# EAGLE board paddlepanelize (EAGLE 7.6.0)
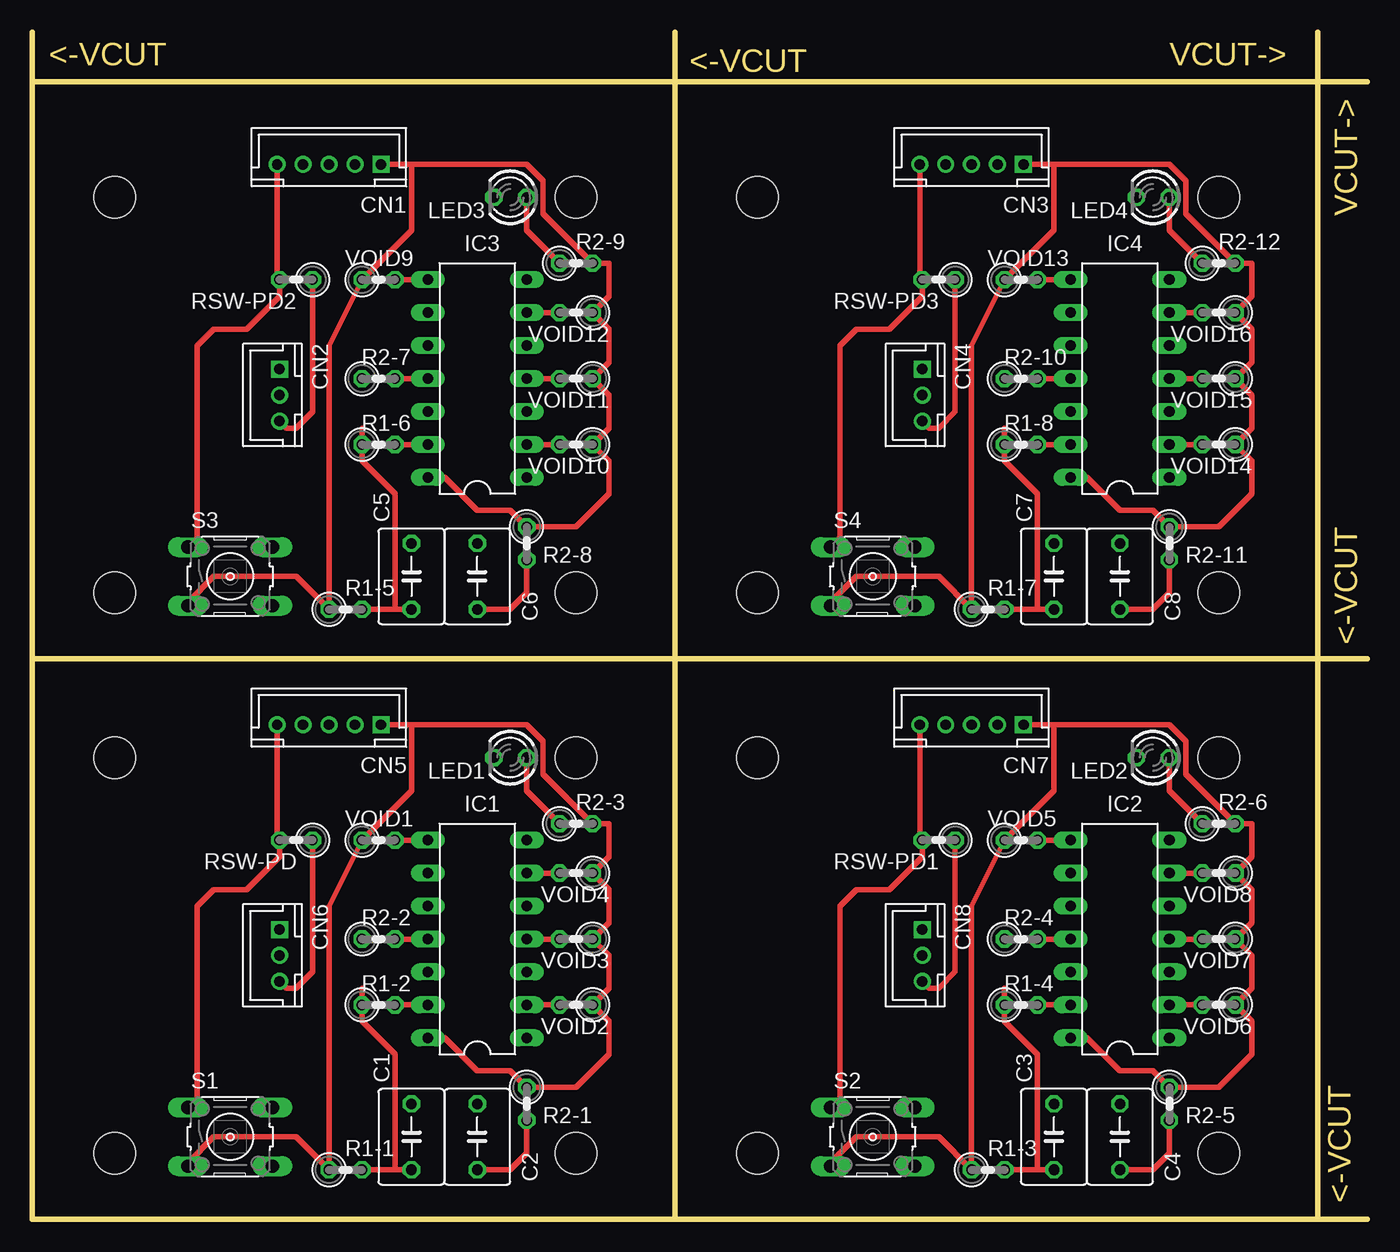
[diagram p0: board, top side]
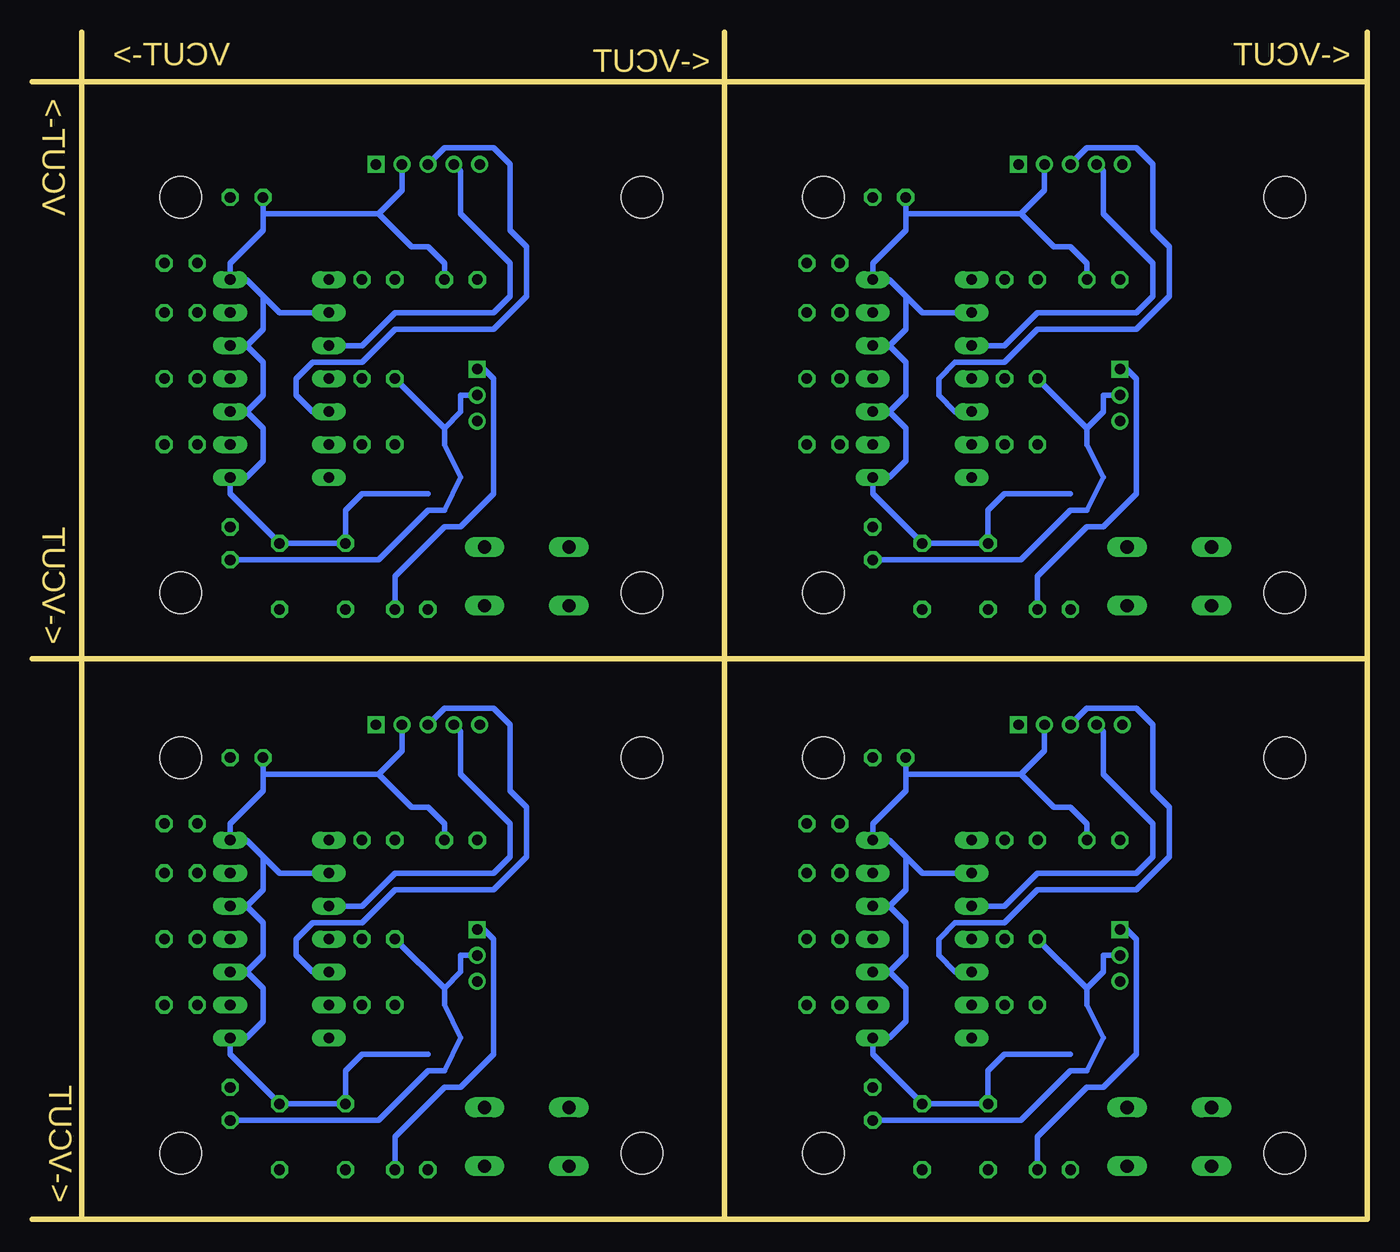
[diagram p1: board, bottom side, seen from below]

Size 102.87 x 91.44 mm. Coordinates in mm from the lower left corner, seen from the top.
Outline: 49.2,87.62 0,87.62
Outline: 49.53,0 49.53,43.17
Outline: 49.53,43.17 49.53,91.44
Outline: 0,43.17 0,40.64 0,0 49.53,0
Outline: 0,43.17 0,43.18
Outline: 0,43.18 0,87.63
Outline: 0,87.63 0,91.44
Outline: 0,87.63 102.87,87.63
Outline: 99.06,91.44 99.06,0
Outline: 0,43.18 102.87,43.18
Outline: 49.53,0 99.06,0
Outline: 99.06,0 102.87,0
Outline: 0,86.35 0,43.17
Outline: 49.53,86.35 49.53,43.17
Outline: 49.53,43.17 49.53,40.64
Outline: 49.2,43.17 0,43.17
Outline: 98.73,43.17 49.53,43.17
Copper layers (1*16): Top 0.035mm / dielectric 1.5mm / Bottom 0.035mm
Design rules "SeeedStudio_2layer_DRU_no_angle_20140221": minimum track width 6mil, minimum drill 12mil, track to track 6mil, track to pad 6mil, pad to pad 6mil, via to via 6mil, smd to smd 0mil, copper to edge 10mil, drill to drill 10mil, minimum pad ring 10mil, minimum via ring 6mil, stop-mask expansion 2mil, vias tented up to drill 100mil, thermal gap 10mil
Holes 3.2 mm at 6.35,78.74 41.91,78.74 6.35,48.26 41.91,48.26 55.88,78.74 91.44,78.74 55.88,48.26 91.44,48.26 6.35,35.56 41.91,35.56 6.35,5.08 41.91,5.08 55.88,35.56 91.44,35.56 55.88,5.08 91.44,5.08

## Footprints (pad centres in the part's own frame; a part is rotated, then mirrored left to right if it is on the bottom)
C050-050X075 = drill 0.813 octagon: 1 -2.54,0; 2 2.54,0
B5B-PH-K-S = drill 0.8 square: 1 -4,0 | drill 0.8: 2 -2,0; 3 0,0; 4 2,0; 5 4,0
B3B-PH-K-S = drill 0.8 square: 1 -2,0 | drill 0.8: 2 0,0; 3 2,0
DIL14 = drill 0.813 long: 1 -7.62,-3.81; 2 -5.08,-3.81; 3 -2.54,-3.81; 4 0,-3.81; 5 2.54,-3.81; 6 5.08,-3.81; 7 7.62,-3.81; 8 7.62,3.81; 9 5.08,3.81; 10 2.54,3.81; 11 0,3.81; 12 -2.54,3.81; 13 -5.08,3.81; 14 -7.62,3.81
LED3MM = drill 0.813 octagon: A -1.27,0; K 1.27,0
0207/2V = drill 0.813 octagon: 1 -1.27,0; 2 1.27,0
B3F-10XX = drill 1.016 long: 1 -3.251,2.261; 2 3.251,2.261; 3 -3.251,-2.261; 4 3.251,-2.261

## Placement (x,y rotation side)
C1  0.1uF  [C050-050X075]  29.21,6.35 90 top
C2  0.1uF  [C050-050X075]  34.29,6.35 90 top
C3  0.1uF  [C050-050X075]  78.74,6.35 90 top
C4  0.1uF  [C050-050X075]  83.82,6.35 90 top
C5  0.1uF  [C050-050X075]  29.21,49.53 90 top
C6  0.1uF  [C050-050X075]  34.29,49.53 90 top
C7  0.1uF  [C050-050X075]  78.74,49.53 90 top
C8  0.1uF  [C050-050X075]  83.82,49.53 90 top
CN1  OutSginal  [B5B-PH-K-S]  22.86,81.28 180 top
CN2  Rotary  [B3B-PH-K-S]  19.05,63.5 270 top
CN3  OutSginal  [B5B-PH-K-S]  72.39,81.28 180 top
CN4  Rotary  [B3B-PH-K-S]  68.58,63.5 270 top
CN5  OutSginal  [B5B-PH-K-S]  22.86,38.1 180 top
CN6  Rotary  [B3B-PH-K-S]  19.05,20.32 270 top
CN7  OutSginal  [B5B-PH-K-S]  72.39,38.1 180 top
CN8  Rotary  [B3B-PH-K-S]  68.58,20.32 270 top
IC1  74LS14N  [DIL14]  34.29,21.59 90 top
IC2  74LS14N  [DIL14]  83.82,21.59 90 top
IC3  74LS14N  [DIL14]  34.29,64.77 90 top
IC4  74LS14N  [DIL14]  83.82,64.77 90 top
LED1  [LED3MM]  36.83,35.56 180 top
LED2  [LED3MM]  86.36,35.56 180 top
LED3  [LED3MM]  36.83,78.74 180 top
LED4  [LED3MM]  86.36,78.74 180 top
R1-1  10K  [0207/2V]  24.13,3.81 0 top
R1-2  100  [0207/2V]  26.67,16.51 0 top
R1-3  10K  [0207/2V]  73.66,3.81 0 top
R1-4  100  [0207/2V]  76.2,16.51 0 top
R1-5  10K  [0207/2V]  24.13,46.99 0 top
R1-6  100  [0207/2V]  26.67,59.69 0 top
R1-7  10K  [0207/2V]  73.66,46.99 0 top
R1-8  100  [0207/2V]  76.2,59.69 0 top
R2-1  10K  [0207/2V]  38.1,8.89 270 top
R2-2  100  [0207/2V]  26.67,21.59 0 top
R2-3  480  [0207/2V]  41.91,30.48 0 top
R2-4  100  [0207/2V]  76.2,21.59 0 top
R2-5  10K  [0207/2V]  87.63,8.89 270 top
R2-6  480  [0207/2V]  91.44,30.48 0 top
R2-7  100  [0207/2V]  26.67,64.77 0 top
R2-8  10K  [0207/2V]  38.1,52.07 270 top
R2-9  480  [0207/2V]  41.91,73.66 0 top
R2-10  100  [0207/2V]  76.2,64.77 0 top
R2-11  10K  [0207/2V]  87.63,52.07 270 top
R2-12  480  [0207/2V]  91.44,73.66 0 top
RSW-PD  10K  [0207/2V]  20.32,29.21 180 top
RSW-PD1  10K  [0207/2V]  69.85,29.21 180 top
RSW-PD2  10K  [0207/2V]  20.32,72.39 180 top
RSW-PD3  10K  [0207/2V]  69.85,72.39 180 top
S1  1  [B3F-10XX]  15.24,6.35 0 top
S2  1  [B3F-10XX]  64.77,6.35 0 top
S3  1  [B3F-10XX]  15.24,49.53 0 top
S4  1  [B3F-10XX]  64.77,49.53 0 top
VOID1  10K  [0207/2V]  26.67,29.21 0 top
VOID2  10K  [0207/2V]  41.91,16.51 180 top
VOID3  10K  [0207/2V]  41.91,21.59 180 top
VOID4  10K  [0207/2V]  41.91,26.67 180 top
VOID5  10K  [0207/2V]  76.2,29.21 0 top
VOID6  10K  [0207/2V]  91.44,16.51 180 top
VOID7  10K  [0207/2V]  91.44,21.59 180 top
VOID8  10K  [0207/2V]  91.44,26.67 180 top
VOID9  10K  [0207/2V]  26.67,72.39 0 top
VOID10  10K  [0207/2V]  41.91,59.69 180 top
VOID11  10K  [0207/2V]  41.91,64.77 180 top
VOID12  10K  [0207/2V]  41.91,69.85 180 top
VOID13  10K  [0207/2V]  76.2,72.39 0 top
VOID14  10K  [0207/2V]  91.44,59.69 180 top
VOID15  10K  [0207/2V]  91.44,64.77 180 top
VOID16  10K  [0207/2V]  91.44,69.85 180 top

## Library data of the parts
C1-C8 R1-1-R1-8 R2-1-R2-12 RSW-PD RSW-PD1-RSW-PD3 VOID1-VOID16 = resistor
CN1-CN8 = jst-ph
IC1-IC4 = 74xx-us
LED1-LED4 = led
S1-S4 = switch-omron; MPN: B3F-1000; OC_FARNELL: 176432; OC_NEWARK: 36M3542

## Nets
GND: C1.2 C2.2 CN5.2 CN6.3 IC1.1 IC1.3 IC1.5 IC1.7 IC1.9 LED1.K RSW-PD.1
GND1: C3.2 C4.2 CN7.2 CN8.3 IC2.1 IC2.3 IC2.5 IC2.7 IC2.9 LED2.K RSW-PD1.1
GND2: C5.2 C6.2 CN1.2 CN2.3 IC3.1 IC3.3 IC3.5 IC3.7 IC3.9 LED3.K RSW-PD2.1
GND3: C7.2 C8.2 CN3.2 CN4.3 IC4.1 IC4.3 IC4.5 IC4.7 IC4.9 LED4.K RSW-PD3.1
N$1: C1.1 CN6.1 R1-1.2 R1-2.1
N$2: IC1.13 R1-2.2
N$3: C2.1 CN6.2 R2-1.2 R2-2.1
N$4: IC1.11 R2-2.2
N$5: IC1.8 VOID1.2
N$6: IC1.2 VOID2.2
N$7: IC1.4 VOID3.2
N$8: IC1.6 VOID4.2
N$9: CN5.5 RSW-PD.2 S1.1
N$10: CN5.3 IC1.12
N$11: CN5.4 IC1.10
N$12: LED1.A R2-3.1
N$13: C3.1 CN8.1 R1-3.2 R1-4.1
N$14: IC2.13 R1-4.2
N$15: C4.1 CN8.2 R2-4.1 R2-5.2
N$16: IC2.11 R2-4.2
N$17: IC2.8 VOID5.2
N$18: IC2.2 VOID6.2
N$19: IC2.4 VOID7.2
N$20: IC2.6 VOID8.2
N$21: CN7.5 RSW-PD1.2 S2.1
N$22: CN7.3 IC2.12
N$23: CN7.4 IC2.10
N$24: LED2.A R2-6.1
N$25: C5.1 CN2.1 R1-5.2 R1-6.1
N$26: IC3.13 R1-6.2
N$27: C6.1 CN2.2 R2-7.1 R2-8.2
N$28: IC3.11 R2-7.2
N$29: IC3.8 VOID9.2
N$30: IC3.2 VOID10.2
N$31: IC3.4 VOID11.2
N$32: IC3.6 VOID12.2
N$33: CN1.5 RSW-PD2.2 S3.1
N$34: CN1.3 IC3.12
N$35: CN1.4 IC3.10
N$36: LED3.A R2-9.1
N$37: C7.1 CN4.1 R1-7.2 R1-8.1
N$38: IC4.13 R1-8.2
N$39: C8.1 CN4.2 R2-10.1 R2-11.2
N$40: IC4.11 R2-10.2
N$41: IC4.8 VOID13.2
N$42: IC4.2 VOID14.2
N$43: IC4.4 VOID15.2
N$44: IC4.6 VOID16.2
N$45: CN3.5 RSW-PD3.2 S4.1
N$46: CN3.3 IC4.12
N$47: CN3.4 IC4.10
N$48: LED4.A R2-12.1
VCC: CN5.1 IC1.14 R1-1.1 R2-1.1 R2-3.2 S1.3 VOID1.1 VOID2.1 VOID3.1 VOID4.1
VCC1: CN7.1 IC2.14 R1-3.1 R2-5.1 R2-6.2 S2.3 VOID5.1 VOID6.1 VOID7.1 VOID8.1
VCC2: CN1.1 IC3.14 R1-5.1 R2-8.1 R2-9.2 S3.3 VOID9.1 VOID10.1 VOID11.1 VOID12.1
VCC3: CN3.1 IC4.14 R1-7.1 R2-11.1 R2-12.2 S4.3 VOID13.1 VOID14.1 VOID15.1 VOID16.1

## Tracks (layer width: path | path; a pad name or v marks a point on that pad's centre or on a via)
GND
  Top 0.406: RSW-PD.1 21.59,19.05 20.32,17.78 19.59,17.78 CN6.3
  Bottom 0.406: LED1.K 35.56,34.29 | 35.56,34.29 35.56,33.02 38.1,30.48 IC1.7 36.83,29.21 35.56,27.94 | 22.86,12.7 27.94,12.7 29.21,11.43 C1.2 C2.2 38.1,12.7 IC1.1 36.83,13.97 35.56,15.24 35.56,17.78 36.83,19.05 | 26.67,34.29 24.13,31.75 22.86,31.75 21.59,30.48 RSW-PD.1 | 26.67,34.29 35.56,34.29 | 35.56,27.94 34.29,26.67 IC1.9 | 35.56,27.94 35.56,25.4 36.83,24.13 | IC1.5 36.83,24.13 | 36.83,24.13 35.56,22.86 35.56,20.32 36.83,19.05 | IC1.3 36.83,19.05 | CN5.2 24.86,36.1 26.67,34.29
GND1
  Top 0.406: RSW-PD1.1 71.12,19.05 69.85,17.78 69.12,17.78 CN8.3
  Bottom 0.406: LED2.K 85.09,34.29 | 85.09,34.29 85.09,33.02 87.63,30.48 IC2.7 86.36,29.21 85.09,27.94 | 72.39,12.7 77.47,12.7 78.74,11.43 C3.2 C4.2 87.63,12.7 IC2.1 86.36,13.97 85.09,15.24 85.09,17.78 86.36,19.05 | 76.2,34.29 73.66,31.75 72.39,31.75 71.12,30.48 RSW-PD1.1 | 76.2,34.29 85.09,34.29 | 85.09,27.94 83.82,26.67 IC2.9 | 85.09,27.94 85.09,25.4 86.36,24.13 | IC2.5 86.36,24.13 | 86.36,24.13 85.09,22.86 85.09,20.32 86.36,19.05 | IC2.3 86.36,19.05 | CN7.2 74.39,36.1 76.2,34.29
GND2
  Top 0.406: RSW-PD2.1 21.59,62.23 20.32,60.96 19.59,60.96 CN2.3
  Bottom 0.406: LED3.K 35.56,77.47 | 35.56,77.47 35.56,76.2 38.1,73.66 IC3.7 36.83,72.39 35.56,71.12 | 22.86,55.88 27.94,55.88 29.21,54.61 C5.2 C6.2 38.1,55.88 IC3.1 36.83,57.15 35.56,58.42 35.56,60.96 36.83,62.23 | 26.67,77.47 24.13,74.93 22.86,74.93 21.59,73.66 RSW-PD2.1 | 26.67,77.47 35.56,77.47 | 35.56,71.12 34.29,69.85 IC3.9 | 35.56,71.12 35.56,68.58 36.83,67.31 | IC3.5 36.83,67.31 | 36.83,67.31 35.56,66.04 35.56,63.5 36.83,62.23 | IC3.3 36.83,62.23 | CN1.2 24.86,79.28 26.67,77.47
GND3
  Top 0.406: RSW-PD3.1 71.12,62.23 69.85,60.96 69.12,60.96 CN4.3
  Bottom 0.406: LED4.K 85.09,77.47 | 85.09,77.47 85.09,76.2 87.63,73.66 IC4.7 86.36,72.39 85.09,71.12 | 72.39,55.88 77.47,55.88 78.74,54.61 C7.2 C8.2 87.63,55.88 IC4.1 86.36,57.15 85.09,58.42 85.09,60.96 86.36,62.23 | 76.2,77.47 73.66,74.93 72.39,74.93 71.12,73.66 RSW-PD3.1 | 76.2,77.47 85.09,77.47 | 85.09,71.12 83.82,69.85 IC4.9 | 85.09,71.12 85.09,68.58 86.36,67.31 | IC4.5 86.36,67.31 | 86.36,67.31 85.09,66.04 85.09,63.5 86.36,62.23 | IC4.3 86.36,62.23 | CN3.2 74.39,79.28 76.2,77.47
N$1
  Top 0.406: 27.94,3.81 27.94,12.7 25.4,15.24 R1-2.1 25.4,17.78 | C1.1 27.94,3.81 | 27.94,3.81 R1-1.2
  Bottom 0.406: R1-1.2 25.4,6.35 21.59,10.16 20.32,10.16 17.78,12.7 17.78,21.59 18.51,22.32 CN6.1
N$2
  Top 0.406: R1-2.2 IC1.13
N$3
  Top 0.406: C2.1 36.83,3.81 38.1,5.08 R2-1.2
  Bottom 0.406: 21.59,17.78 R2-2.1 | R2-1.2 26.67,7.62 22.86,11.43 21.59,11.43 20.32,13.97 21.59,16.51 21.59,17.78 | 21.59,17.78 20.32,19.05 20.32,20.32 CN6.2
N$4
  Top 0.406: R2-2.2 IC1.11
N$5
  Top 0.406: VOID1.2 IC1.8
N$6
  Top 0.406: VOID2.2 IC1.2
N$7
  Top 0.406: VOID3.2 IC1.4
N$8
  Top 0.406: VOID4.2 IC1.6
N$9
  Top 0.406: S1.1 12.7,9.32 12.7,24.13 13.97,25.4 16.51,25.4 19.05,27.94 RSW-PD.2 18.86,29.4 CN5.5
N$10
  Bottom 0.406: IC1.12 31.75,19.05 33.02,20.32 33.02,21.59 31.75,22.86 27.94,22.86 25.4,25.4 17.78,25.4 15.24,27.94 15.24,31.75 16.51,33.02 16.51,38.1 17.78,39.37 21.59,39.37 CN5.3
N$11
  Bottom 0.406: IC1.10 27.94,24.13 25.4,26.67 17.78,26.67 16.51,27.94 16.51,30.48 20.32,34.29 20.32,37.56 CN5.4
N$12
  Top 0.406: LED1.A 38.1,33.02 R2-3.1
N$13
  Top 0.406: 77.47,3.81 77.47,12.7 74.93,15.24 R1-4.1 74.93,17.78 | C3.1 77.47,3.81 | 77.47,3.81 R1-3.2
  Bottom 0.406: R1-3.2 74.93,6.35 71.12,10.16 69.85,10.16 67.31,12.7 67.31,21.59 68.04,22.32 CN8.1
N$14
  Top 0.406: R1-4.2 IC2.13
N$15
  Top 0.406: C4.1 86.36,3.81 87.63,5.08 R2-5.2
  Bottom 0.406: 71.12,17.78 R2-4.1 | R2-5.2 76.2,7.62 72.39,11.43 71.12,11.43 69.85,13.97 71.12,16.51 71.12,17.78 | 71.12,17.78 69.85,19.05 69.85,20.32 CN8.2
N$16
  Top 0.406: R2-4.2 IC2.11
N$17
  Top 0.406: VOID5.2 IC2.8
N$18
  Top 0.406: VOID6.2 IC2.2
N$19
  Top 0.406: VOID7.2 IC2.4
N$20
  Top 0.406: VOID8.2 IC2.6
N$21
  Top 0.406: S2.1 62.23,9.32 62.23,24.13 63.5,25.4 66.04,25.4 68.58,27.94 RSW-PD1.2 68.39,29.4 CN7.5
N$22
  Bottom 0.406: IC2.12 81.28,19.05 82.55,20.32 82.55,21.59 81.28,22.86 77.47,22.86 74.93,25.4 67.31,25.4 64.77,27.94 64.77,31.75 66.04,33.02 66.04,38.1 67.31,39.37 71.12,39.37 CN7.3
N$23
  Bottom 0.406: IC2.10 77.47,24.13 74.93,26.67 67.31,26.67 66.04,27.94 66.04,30.48 69.85,34.29 69.85,37.56 CN7.4
N$24
  Top 0.406: LED2.A 87.63,33.02 R2-6.1
N$25
  Top 0.406: 27.94,46.99 27.94,55.88 25.4,58.42 R1-6.1 25.4,60.96 | C5.1 27.94,46.99 | 27.94,46.99 R1-5.2
  Bottom 0.406: R1-5.2 25.4,49.53 21.59,53.34 20.32,53.34 17.78,55.88 17.78,64.77 18.51,65.5 CN2.1
N$26
  Top 0.406: R1-6.2 IC3.13
N$27
  Top 0.406: C6.1 36.83,46.99 38.1,48.26 R2-8.2
  Bottom 0.406: 21.59,60.96 R2-7.1 | R2-8.2 26.67,50.8 22.86,54.61 21.59,54.61 20.32,57.15 21.59,59.69 21.59,60.96 | 21.59,60.96 20.32,62.23 20.32,63.5 CN2.2
N$28
  Top 0.406: R2-7.2 IC3.11
N$29
  Top 0.406: VOID9.2 IC3.8
N$30
  Top 0.406: VOID10.2 IC3.2
N$31
  Top 0.406: VOID11.2 IC3.4
N$32
  Top 0.406: VOID12.2 IC3.6
N$33
  Top 0.406: S3.1 12.7,52.5 12.7,67.31 13.97,68.58 16.51,68.58 19.05,71.12 RSW-PD2.2 18.86,72.58 CN1.5
N$34
  Bottom 0.406: IC3.12 31.75,62.23 33.02,63.5 33.02,64.77 31.75,66.04 27.94,66.04 25.4,68.58 17.78,68.58 15.24,71.12 15.24,74.93 16.51,76.2 16.51,81.28 17.78,82.55 21.59,82.55 CN1.3
N$35
  Bottom 0.406: IC3.10 27.94,67.31 25.4,69.85 17.78,69.85 16.51,71.12 16.51,73.66 20.32,77.47 20.32,80.74 CN1.4
N$36
  Top 0.406: LED3.A 38.1,76.2 R2-9.1
N$37
  Top 0.406: 77.47,46.99 77.47,55.88 74.93,58.42 R1-8.1 74.93,60.96 | C7.1 77.47,46.99 | 77.47,46.99 R1-7.2
  Bottom 0.406: R1-7.2 74.93,49.53 71.12,53.34 69.85,53.34 67.31,55.88 67.31,64.77 68.04,65.5 CN4.1
N$38
  Top 0.406: R1-8.2 IC4.13
N$39
  Top 0.406: C8.1 86.36,46.99 87.63,48.26 R2-11.2
  Bottom 0.406: 71.12,60.96 R2-10.1 | R2-11.2 76.2,50.8 72.39,54.61 71.12,54.61 69.85,57.15 71.12,59.69 71.12,60.96 | 71.12,60.96 69.85,62.23 69.85,63.5 CN4.2
N$40
  Top 0.406: R2-10.2 IC4.11
N$41
  Top 0.406: VOID13.2 IC4.8
N$42
  Top 0.406: VOID14.2 IC4.2
N$43
  Top 0.406: VOID15.2 IC4.4
N$44
  Top 0.406: VOID16.2 IC4.6
N$45
  Top 0.406: S4.1 62.23,52.5 62.23,67.31 63.5,68.58 66.04,68.58 68.58,71.12 RSW-PD3.2 68.39,72.58 CN3.5
N$46
  Bottom 0.406: IC4.12 81.28,62.23 82.55,63.5 82.55,64.77 81.28,66.04 77.47,66.04 74.93,68.58 67.31,68.58 64.77,71.12 64.77,74.93 66.04,76.2 66.04,81.28 67.31,82.55 71.12,82.55 CN3.3
N$47
  Bottom 0.406: IC4.10 77.47,67.31 74.93,69.85 67.31,69.85 66.04,71.12 66.04,73.66 69.85,77.47 69.85,80.74 CN3.4
N$48
  Top 0.406: LED4.A 87.63,76.2 R2-12.1
VCC
  Top 0.406: CN5.1 29.21,38.1 | 29.21,38.1 38.1,38.1 39.37,36.83 39.37,34.29 R2-3.2 44.45,30.48 44.45,27.94 VOID4.1 44.45,25.4 44.45,22.86 VOID3.1 44.45,20.32 44.45,17.78 VOID2.1 44.45,15.24 44.45,12.7 41.91,10.16 R2-1.1 36.83,11.43 34.29,11.43 31.75,13.97 IC1.14 | S1.3 11.99,4.37 13.97,6.35 20.32,6.35 R1-1.1 22.86,24.13 VOID1.1 29.21,33.02 29.21,38.1
VCC1
  Top 0.406: CN7.1 78.74,38.1 | 78.74,38.1 87.63,38.1 88.9,36.83 88.9,34.29 R2-6.2 93.98,30.48 93.98,27.94 VOID8.1 93.98,25.4 93.98,22.86 VOID7.1 93.98,20.32 93.98,17.78 VOID6.1 93.98,15.24 93.98,12.7 91.44,10.16 R2-5.1 86.36,11.43 83.82,11.43 81.28,13.97 IC2.14 | S2.3 61.52,4.37 63.5,6.35 69.85,6.35 R1-3.1 72.39,24.13 VOID5.1 78.74,33.02 78.74,38.1
VCC2
  Top 0.406: CN1.1 29.21,81.28 | 29.21,81.28 38.1,81.28 39.37,80.01 39.37,77.47 R2-9.2 44.45,73.66 44.45,71.12 VOID12.1 44.45,68.58 44.45,66.04 VOID11.1 44.45,63.5 44.45,60.96 VOID10.1 44.45,58.42 44.45,55.88 41.91,53.34 R2-8.1 36.83,54.61 34.29,54.61 31.75,57.15 IC3.14 | S3.3 11.99,47.55 13.97,49.53 20.32,49.53 R1-5.1 22.86,67.31 VOID9.1 29.21,76.2 29.21,81.28
VCC3
  Top 0.406: CN3.1 78.74,81.28 | 78.74,81.28 87.63,81.28 88.9,80.01 88.9,77.47 R2-12.2 93.98,73.66 93.98,71.12 VOID16.1 93.98,68.58 93.98,66.04 VOID15.1 93.98,63.5 93.98,60.96 VOID14.1 93.98,58.42 93.98,55.88 91.44,53.34 R2-11.1 86.36,54.61 83.82,54.61 81.28,57.15 IC4.14 | S4.3 61.52,47.55 63.5,49.53 69.85,49.53 R1-7.1 72.39,67.31 VOID13.1 78.74,76.2 78.74,81.28

## Text on the board
Dimension: <-VCUT | <-VCUT | VCUT-> | VCUT-> | <-VCUT | <-VCUT
_tNames: IRQ1 | SW | VCCIN | IRQ1 | SW | VCCIN | LED1 | LED1 | IRQ2 | GND | CN1 | IRQ2 | GND | CN1 | LED1 | LED1 | IC1 | IC1 | IC1 | R2-3 | IC1 | R2-3 | VOID1 | R2-3 | VOID1 | R2-3 | RSW-PD | VOID1 | RSW-PD | VOID1 | RSW-PD | RSW-PD | VOID4 | VOID4 | VOID4 | VOID4 | IN1 | CN2 | R2-2 | IN1 | CN2 | R2-2 | R2-2 | R2-2 | VOID3 | VOID3 | IN2 | VOID3 | IN2 | VOID3 | R1-2 | R1-2 | R1-2 | R1-2 | IN3(GND) | VOID2 | IN3(GND) | VOID2 | VOID2 | VOID2 | C1 | C1 | S1 | C1 | S1 | C1 | S1 | S1 | R2-1 | R2-1 | R2-1 | R2-1 | R1-1 | R1-1 | R1-1 | R1-1 | C2 | C2 | C2 | C2 | IRQ1 | SW | VCCIN | IRQ1 | SW | VCCIN | LED1 | LED1 | IRQ2 | GND | IRQ2 | GND | CN1 | CN1 | LED1 | IC1 | LED1 | IC1 | R2-3 | R2-3 | VOID1 | IC1 | VOID1 | IC1 | RSW-PD | R2-3 | RSW-PD | R2-3 | VOID1 | VOID1 | RSW-PD | VOID4 | RSW-PD | VOID4 | VOID4 | VOID4 | IN1 | R2-2 | IN1 | R2-2 | CN2 | CN2 | R2-2 | VOID3 | R2-2 | VOID3 | IN2 | IN2 | VOID3 | VOID3 | R1-2 | R1-2 | IN3(GND) | R1-2 | VOID2 | IN3(GND) | R1-2 | VOID2 | VOID2 | VOID2 | S1 | C1 | S1 | C1 | C1 | C1 | S1 | R2-1 | S1 | R2-1 | R1-1 | R2-1 | R1-1 | R2-1 | R1-1 | C2 | R1-1 | C2 | C2 | C2